# Altium PCB PM-1_InterfaceControler.PcbDoc
Units mm, origin at the board's own origin, x right, y up, seen from the top; angles counter-clockwise.
Board outline 31.4 x 21.4 mm, 2 copper layers (Top Layer, Bottom Layer); 30 components, 18 nets, 128 pads, 36 vias.
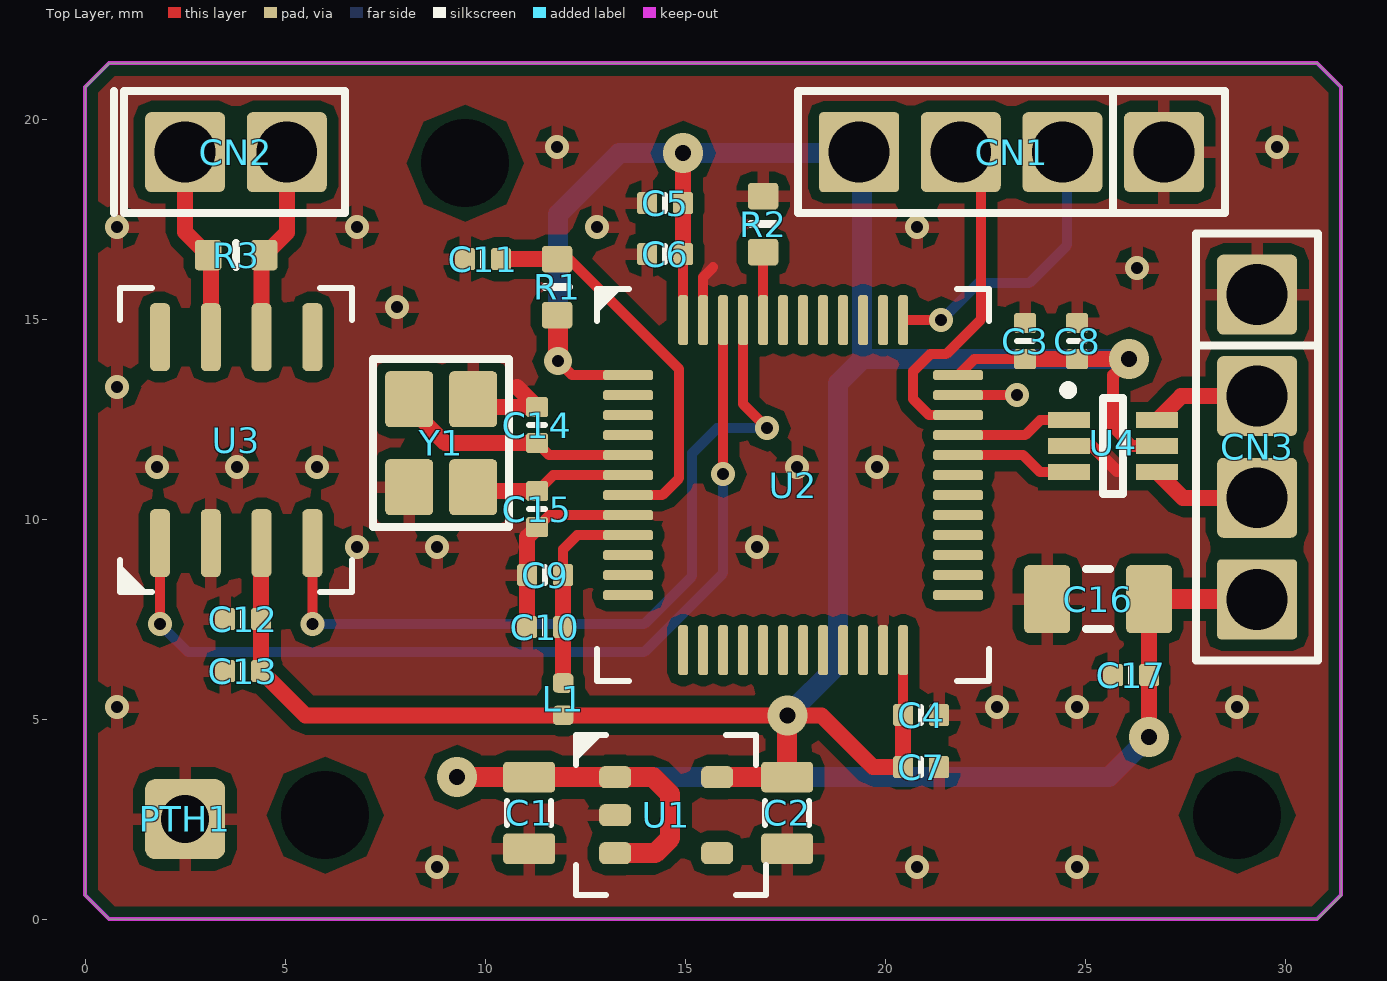
[diagram p0: Top Layer view]
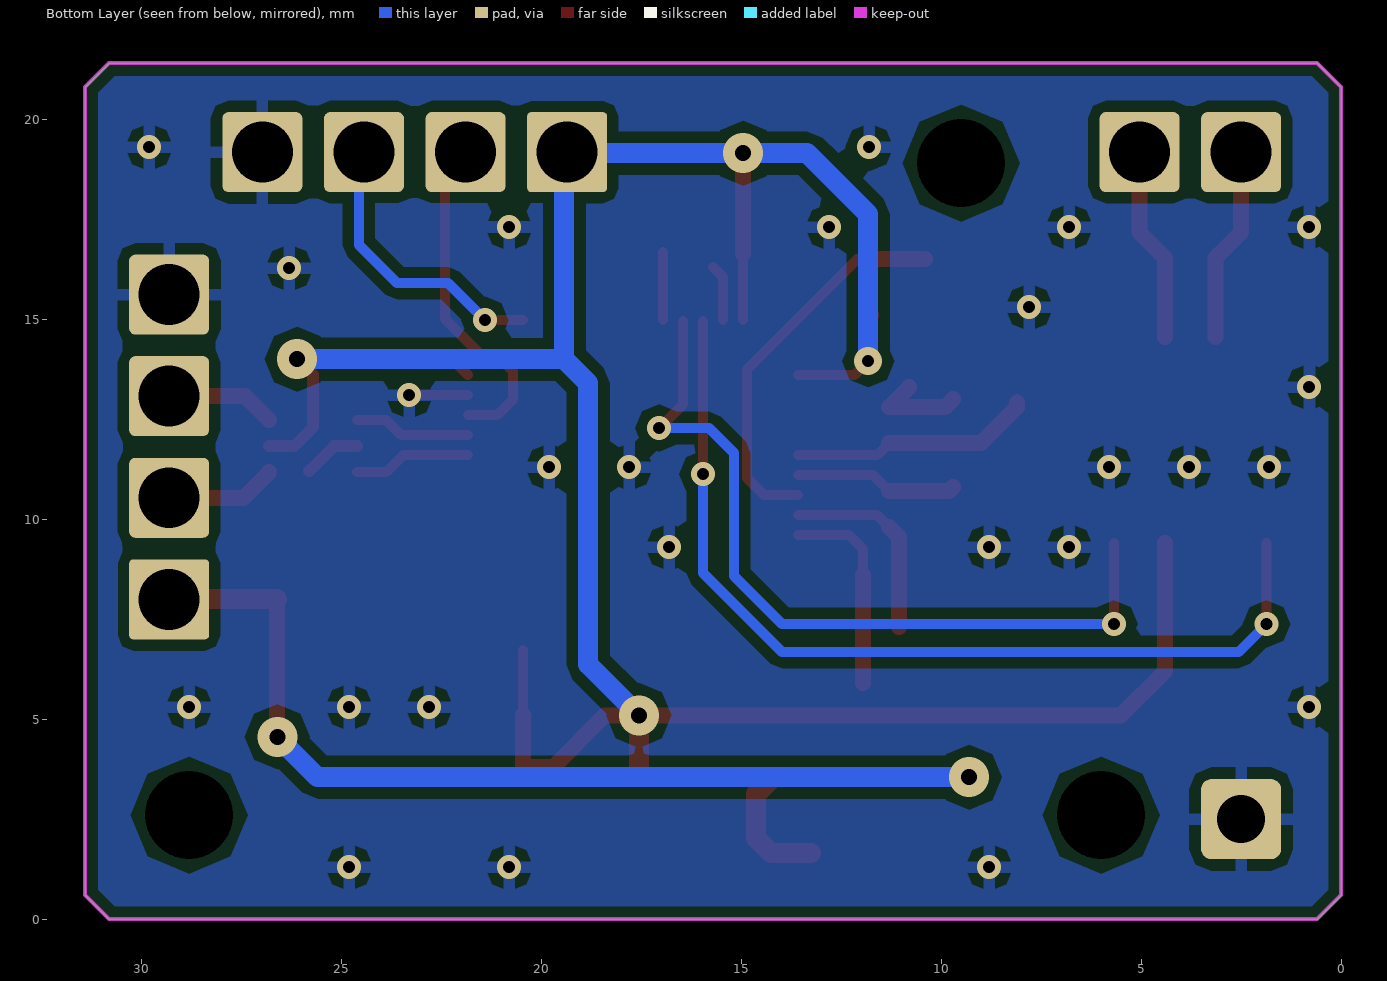
[diagram p1: Bottom Layer view, seen from below]
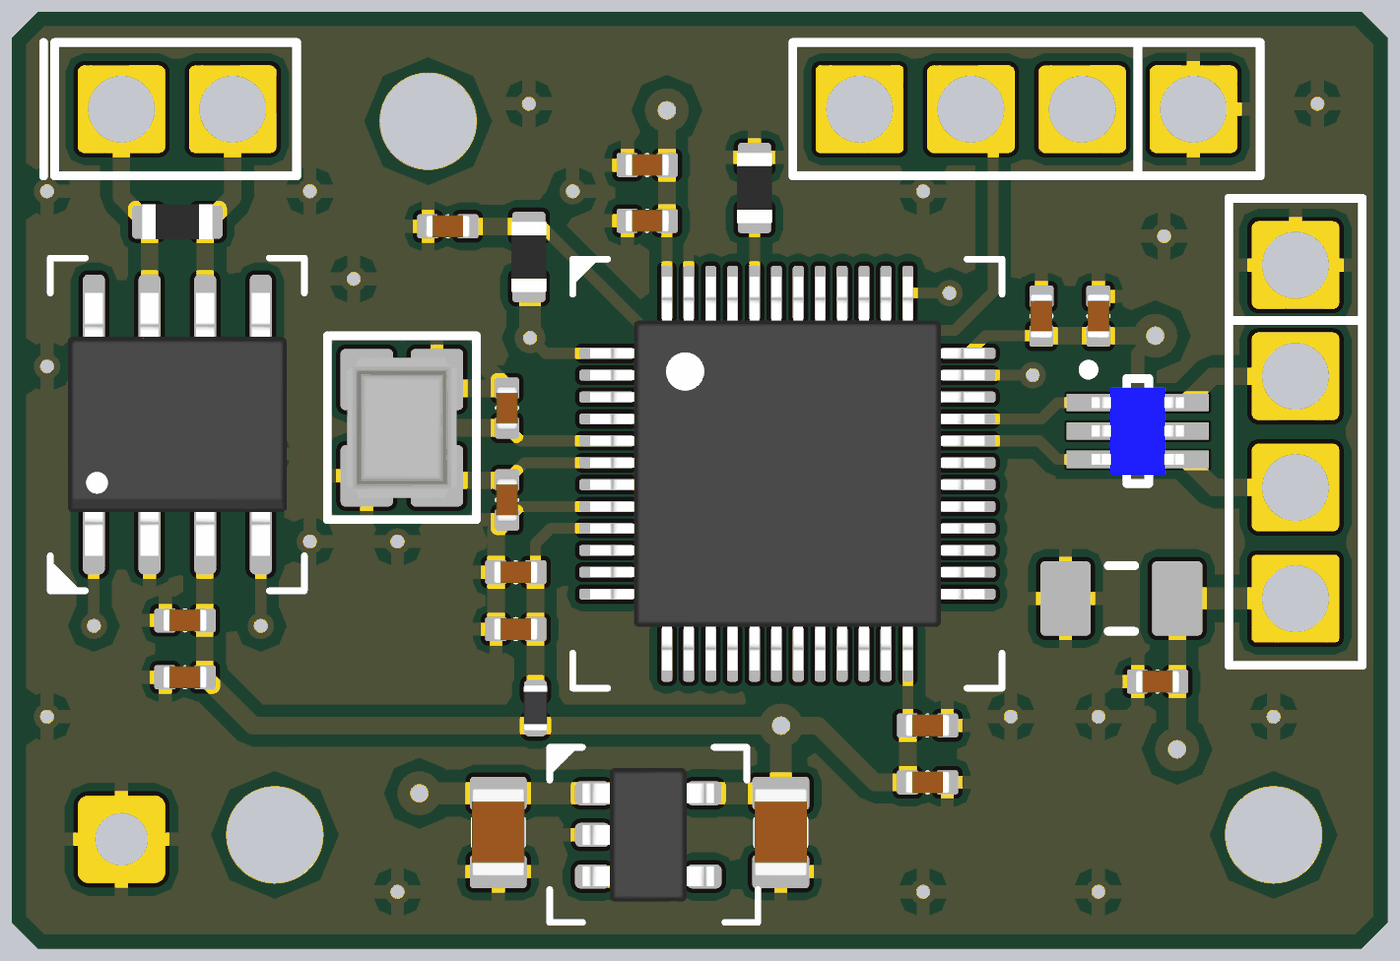
[diagram p2: 3D render of the assembled board from above, using the file's embedded part models]

## Layer stack, top to bottom
Top Solder: solder mask 0.0102, Solder Resist, Dk 3.5
Top Layer: signal copper 0.0356
Dielectric 1: dielectric 0.32, FR-4, Dk 4.8
Bottom Layer: signal copper 0.0356
Bottom Solder: solder mask 0.0102, Solder Resist, Dk 3.5

## Board outline
0,0.6 0,20.8 0.6,21.4 30.8,21.4 31.4,20.8 31.4,0.6 30.8,0 0.6,0

## Design rules (kind name [scope] priority, off if disabled: settings)
Clearance Clearance_Pol [InPolygon and InNet('GND')] p1: gap=0.25 ignorepadtopadclearanceinfootprint=FALSE
Clearance [All] p2: gap=0.2 ignorepadtopadclearanceinfootprint=FALSE
HoleSize PadSize [IsPad] p1: absolutevalues=TRUE maxlimit=5 minlimit=0.3 maxpercent=80.000 minpercent=20.000
HoleSize HoleSize_1 [All] p2: absolutevalues=TRUE maxlimit=5 minlimit=0.3 maxpercent=80.000 minpercent=20.000
HoleToHoleClearance [All] p1: gap=0.25 allowstackedmicrovias=TRUE
MatchedLengths SWD [(InNet('SWCLK') AND InNet('SWDIO'))] p1: tolerance=0.2 checknetsindiffpair=FALSE checkdiffpairvsdiffpair=TRUE checkxsignals=TRUE checkothers=TRUE
MatchedLengths CAN_Transiver [(InNet('CAN_RX') AND InNet('CAN_TX'))] p2: tolerance=0.5 checknetsindiffpair=FALSE checkdiffpairvsdiffpair=TRUE checkxsignals=TRUE checkothers=TRUE
MinimumSolderMaskSliver [All] p1: minsoldermaskwidth=0.15
PlaneConnect [All] p1: planeconnectstyle=Relief reliefexpansion=0.4 reliefentries=4 reliefconductorwidth=0.3 reliefairgap=0.25
PolygonConnect [All] p1: connectstyle=Relief reliefconductorwidth=0.3 reliefentries=4 polygonreliefangle="90 Angle" airgapwidth=0.254
RoomDefinition 1_MCU [InComponentClass('1_MCU')] p1: confinementstyle=ConfineIn formatcopy=TRUE lockcomponents=FALSE outline 6.846,9.446 6.846,14.354 8.771,14.354 8.771,17.229 10.921,17.229 10.921,17.279 13.321,17.279 13.321,18.629 16.071,18.629 16.071,18.854 17.472,18.854 17.472,21.053 28.848,21.053 28.848,17.297 25.529,17.297 25.529,12.871 22.929,12.871 22.929,5.621 22.079,5.621 22.079,3.071 19.721,3.071 19.721,4.471 11.271,4.471 11.271,6.571 10.321,6.571 10.321,9.446
RoomDefinition 2_Power [InComponentClass('2_Power')] p2: confinementstyle=ConfineIn formatcopy=TRUE lockcomponents=FALSE outline 1.146,1.146 1.146,3.854 9.971,3.854 9.971,4.439 11.946,4.439 11.946,4.929 17.354,4.929 17.354,4.439 18.679,4.439 18.679,0.881 17.354,0.881 17.354,0.271 11.946,0.271 11.946,0.881 9.971,0.881 9.971,1.146
RoomDefinition 3_CAN [InComponentClass('3_CAN')] p3: confinementstyle=ConfineIn formatcopy=TRUE lockcomponents=FALSE outline 0.368,17.297 0.368,21.053 6.854,21.053 6.854,16.104 7.004,16.104 7.004,7.846 5.129,7.846 5.129,5.471 2.771,5.471 2.771,7.846 0.546,7.846 0.546,17.297
RoomDefinition 4_USB [InComponentClass('4_USB')] p4: confinementstyle=ConfineIn formatcopy=TRUE lockcomponents=FALSE outline 23.096,6.721 23.096,9.279 23.596,9.279 23.596,13.804 27.422,13.804 27.422,17.493 31.178,17.493 31.178,6.117 27.329,6.117 27.329,5.371 24.971,5.371 24.971,6.721
RoutingVias [All] p1: holewidth=0.3 width=0.7 viastyle="Through Hole" minholewidth=0.3 minwidth=0.6 maxholewidth=2 maxwidth=3
SilkToSilkClearance [All] p1: silktosilkclearance=0.3
SilkToSolderMaskClearance [IsPad] p1: minsilkscreentomaskgap=0.2 clearancetoexposedcopper=TRUE
SolderMaskExpansion [All] p1: expansion=0.1
UnRoutedNet [All] p1: checkbadconnections=TRUE
Width [All] p1: maxlimit=10 minlimit=0.25 preferedwidth=0.25
23 further rules are at their usual default settings.

## Classes and differential pairs
component class 4_USB: C16 C17 CN3 U4
component class 3_CAN: C12 C13 CN2 R3 U3
component class 2_Power: C1 C2 PTH1 U1
component class 1_MCU: C3 C4 C5 C6 C7 C8 C9 C10 C11 C14 C15 CN1 L1 R1 R2 U2 Y1

## Components (designator, comment, footprint, x,y, rotation, side; value= is the part's Value field where it differs from the comment)
C1 "SC1U16V4KX" CAPC0805(2012)145_L 11.1,2.66 r90 top
C2 "SC1U16V4KX" CAPC0805(2012)145_L 17.55,2.66 r90 top
C3 "SC1U10V2KX" CAPC0402(1005)60_L 23.5,14.45 r270 top
C4 "SC1U10V2KX" CAPC0402(1005)60_L 20.9,5.1 r180 top
C5 "SC1U10V2KX" CAPC0402(1005)60_L 14.5,17.9 r0 top
C6 "SC100N50V2KX" CAPC0402(1005)60_L 14.5,16.625 r0 top
C7 "SC100N50V2KX" CAPC0402(1005)60_L 20.9,3.8 r180 top
C8 "SC100N50V2KX" CAPC0402(1005)60_L 24.8,14.45 r270 top
C9 "SC1U10V2KX" CAPC0402(1005)60_L 11.5,8.6 r0 top
C10 "SC100N50V2KX" CAPC0402(1005)60_L 11.5,7.3 r0 top
C11 "SC100N50V2KX" CAPC0402(1005)60_L 9.95,16.5 r0 top
C12 "SC1U10V2KX" CAPC0402(1005)60_L 3.95,7.5 r0 top
C13 "SC100N50V2KX" CAPC0402(1005)60_L 3.95,6.2 r0 top
C14 "SC12P50V2JN" CAPC0402(1005)33_L 11.3,12.35 r270 top
C15 "SC12P50V2JN" CAPC0402(1005)33_L 11.3,10.25 r90 top
C16 "SC47U10V6KX" CAPC1206(3216) 25.325,8 r0 top
C17 "SC100N50V2KX" CAPC0402(1005)60_L 26.15,6.1 r0 top
CN1 "SWD" 4PHEADERS-2D54 26.97,19.175 r180 top
CN2 "CAN" 2PHEADERS-2D54 2.5,19.175 r0 top
CN3 "USB" 4PHEADERS-2D54 29.3,15.615 r270 top
L1 "BLM15AG601SN1D" INDC1005X06L 11.95,5.5 r90 top
PTH1 "GND" POWERHOLE-LP 2.5,2.5 r0 top
R1 "10KR3J" RESC0603(1608)_L 11.8,15.8 r270 top
R2 "10KR3J" RESC0603(1608)_L 16.95,17.375 r270 top
R3 "120R3F" RESC0603(1608)_L 3.775,16.6 r180 top
U1 "LP5907MFX" SOT95P280X145-5L 14.525,2.6 r0 top
U2 "STM32F103C6T7A" TSQFP50P900X900X160-48L 17.7,10.85 r0 top
U3 "SN65HVD232" SOIC127P600X175-8L 3.775,11.975 r90 top
U4 "USBUF01W6" SOT323-6L 25.7,11.9 r270 top
Y1 "FA-12824.0000MF10Z-W3" QRTZ-12mhz 8.9,11.9 r90 top

## Footprints (in the part's own frame and the unit in brackets; to place one, negate y for a bottom-side part, rotate by r counter-clockwise, add the part's x,y. Pads: shape width x height; smd on the part's side, far side on the other; paste and mask are expansions set on the pad)
2PHEADERS-2D54 [mm]
  rrect15% 2x2 hole 1.524: 1(0,0) 2(2.54,0)
  silkscreen extent -1.78,-1.52 4,1.52
4PHEADERS-2D54 [mm]
  rrect15% 2x2 hole 1.524: 1(0,0) 2(2.54,0) 3(5.08,0)
  rrect10% 2x2 hole 1.524: 4(7.62,0)
  silkscreen extent -1.52,-1.52 9.14,1.52
CAPC0402(1005)33_L [mm]
  rrect25% 0.5x0.55 smd: 1(-0.45,0) 2(0.45,0)
  silkscreen extent 0,-0.2 0,0.2, body extent -0.5,-0.25 0.5,0.25, height 0.55
CAPC0402(1005)60_L [mm]
  rrect25% 0.5x0.55 smd: 1(-0.45,0) 2(0.45,0)
  silkscreen extent 0,-0.2 0,0.2, body extent -0.5,-0.25 0.5,0.25, height 0.6
CAPC0805(2012)145_L [mm]
  rrect25% 0.76x1.3 smd: 1(-0.9,0) 2(0.89,0)
  silkscreen extent -0.3,-0.55 0.3,0.55, body extent -1,-0.6 1,0.6, height 1.45
CAPC1206(3216) [mm] "Chip Capacitor, 2-Leads, Body 3,20x1,60mm, IPC High Density"
  rrect20% 1.15x1.7 smd: 1(-1.275,0) 2(1.275,0)
  silkscreen extent -0.3,-0.75 0.3,0.75, body extent -1.7,-0.9 1.7,0.9, height 1.6
INDC1005X06L [mm] "Chip Inductor, 2-Leads, Body 1,00x0,50mm, IPC High Density"
  rrect50% 0.49x0.52 smd: 1(-0.405,0) 2(0.405,0)
  body extent -0.53,-0.28 0.53,0.28, height 0.55
POWERHOLE-LP [mm]
  rrect25% 2x2 hole 1.2: 1(0,0)
QRTZ-12mhz [mm]
  rrect20% 1.4x1.2 smd: 1(-1.1,-0.8) 2(1.1,-0.8) 3(1.1,0.8) 4(-1.1,0.8)
  silkscreen extent -2.1,-1.7 2.1,1.7, body extent -1.6,-1.25 1.6,1.25, height 0.8
RESC0603(1608)_L [mm]
  rrect25% 0.66x0.76 smd: 1(-0.7,0) 2(0.7,0)
  silkscreen extent 0,-0.3 0,0.3, body extent -0.8,-0.4 0.8,0.4, height 0.45
SOIC127P600X175-8L [mm] "SOIC, 8-Leads, Body 4,90x3,90mm, Pitch 1,27mm, IPC High Density"
  rrect50% 1.7x0.5 smd: 1(-2.575,1.905) 2(-2.575,0.635) 3(-2.575,-0.635) 4(-2.575,-1.905) 5(2.575,-1.905) 6(2.575,-0.635) 7(2.575,0.635) 8(2.575,1.905)
  silkscreen extent -3.8,-2.9 3.8,2.9, body extent -3,-2.5 3,2.5, height 1.75
SOT95P280X145-5L [mm] "SOT23, 5-Leads, Body 2,90x2,80mm, Pitch 0,95mm, IPC High Density"
  rrect50% 0.8x0.55 smd: 1(-1.275,0.95) 2(-1.275,0) 3(-1.275,-0.95) 4(1.275,-0.95) 5(1.275,0.95)
  silkscreen extent -2.25,-2 2.5,2, body extent -1.5,-1.53 1.5,1.53, height 1.45
SOT323-6L [mm]
  rect 0.4x1.05 smd mask+0.05: 1(-0.575,-1.1) 2(0.075,-1.1) 3(0.725,-1.1) 4(0.725,1.1) 5(0.075,1.1) 6(-0.575,1.1)
  round 0.5 on Mech2: 7(-0.725,-0.9)
  silkscreen extent -1.42,-1.22 1.28,0.25, body extent -0.92,-1.05 1.08,1.05, height 0.91
TSQFP50P900X900X160-48L [mm] "TSQFP, 48-Leads, Body 7,00x7,00mm, Pitch 0,50mm, IPC High Density"
  rrect50% 1.25x0.25 smd: 1(-4.125,2.75) 2(-4.125,2.25) 3(-4.125,1.75) 4(-4.125,1.25) 5(-4.125,0.75) 6(-4.125,0.25) 7(-4.125,-0.25) 8(-4.125,-0.75) 9(-4.125,-1.25) 10(-4.125,-1.75) 11(-4.125,-2.25) 12(-4.125,-2.75) 25(4.125,-2.75) 26(4.125,-2.25) 27(4.125,-1.75) 28(4.125,-1.25) 29(4.125,-0.75) 30(4.125,-0.25) 31(4.125,0.25) 32(4.125,0.75) 33(4.125,1.25) 34(4.125,1.75) 35(4.125,2.25) 36(4.125,2.75)
  rrect50% 0.25x1.25 smd: 13(-2.75,-4.125) 14(-2.25,-4.125) 15(-1.75,-4.125) 16(-1.25,-4.125) 17(-0.75,-4.125) 18(-0.25,-4.125) 19(0.25,-4.125) 20(0.75,-4.125) 21(1.25,-4.125) 22(1.75,-4.125) 23(2.25,-4.125) 24(2.75,-4.125) 37(2.75,4.125) 38(2.25,4.125) 39(1.75,4.125) 40(1.25,4.125) 41(0.75,4.125) 42(0.25,4.125) 43(-0.25,4.125) 44(-0.75,4.125) 45(-1.25,4.125) 46(-1.75,4.125) 47(-2.25,4.125) 48(-2.75,4.125)
  silkscreen extent -4.9,-4.9 4.9,4.9, body extent -4.5,-4.5 4.5,4.5, height 1.6

## Part data
C1 C2: library part CAP(0805)1UF16V, "CAP 1uF 16V ±10% 0805(1610 Metric) Thickness 0.6mm SMD"
C3 C4 C5 C9 C12: library part CAP(0402)1UF10V, "CAP 1uF 10V ±10% 0402 (1005 Metric) Thickness 0.6mm SMD"
C6 C7 C8 C10 C11 C13 C17: library part CAP(0402)100nF50V, "CAP 100nF 50V ±10% 0402 (1005 Metric) Thickness 0.6mm SMD"
C14 C15: library part CAP12pF, "CAP 12pF 50V ±5% 0402 (1005 Metric) Thickness 0.33mm SMD"
C16: library part CAP(1206)47UF10V, "CAP 47uF 10V ±10% 1206(3216 Metric) Thickness 1.8mm SMD"
CN1 CN3: library part 4PIN-CN, "4 holes for 18awg wire", Manufacturer=JST, Package Reference=JST-BM04B-GHS-TBT, Datasheet URL=http://www.jst-mfg.com/product/pdf/eng/eGH.pdf
CN2: library part 2PIN-CN, "2 holes for 18awg wire", Manufacturer=JST, Package Reference=JST-BM04B-GHS-TBT, Datasheet URL=http://www.jst-mfg.com/product/pdf/eng/eGH.pdf
L1: library part IND-filt, "Chip Ferrite Bead Single Type 600 Ohms 300mA"
PTH1: library part PTH-1D2M, "1.2mm hole 2mm pad", Hole diameter (mm)=2.5, Pad diameter (mm)=5
R1 R2: library part RES0(0603)_10K, "10K 0.1W 5% 0603 (1608 Metric)  SMD"
R3: library part RES0(0603)_120R, "120R 0.1W 1% 0603 (1608 Metric)  SMD"
U1: library part LP5907V3.3, "3.3V 250mA"
U2: "ARM® Cortex®-M3 STM32F1 Microcontroller IC 32-Bit 72MHz 32KB 48-LFQP (7x7)", Case/Package=UFQFN-48, Operating Frequency(F) (Processor speed) (MHz)=80, Package Description="48-Pin Ultra Thin Fine Pitch Quad Flat No-Lead, 7 x 7 x 0.6 mm Body, 0.5 mm Pitch, Exposed Pad", Package Reference=UFQFPN48, Supply Voltage(Vcc) min (V)=2, ComponentLink1Description="Manufacturer URL", ComponentLink1URL=http://www.st.com/, ComponentLink2Description=Datasheet, ComponentLink2URL=http://www.st.com/st-web-ui/static/active/en/resource/technical/document/datasheet/CD00161566.pdf, Core="ARM Cortex-M4", FLASH Size (Prog) (kB)=512, I/Os=38, Internal RAM Size (kB)=160, Mounting Technology="Surface Mount", Packing="Tape and Reel", RoHS Compliant=Yes
U3: library part CAN_SN65HVD232D, "IC CAN TRANSCEIVER 8-SOIC"
Y1: library part XTAL-1-3-4, "Crystal, 24 MHz, +/- 10 ppm, -20 to 75 degC, 4-Pin SMD, RoHS, Tape and Reel", Case/Package=SMD/SMT, ESR (Equivalent Series Resistance)=80R, Frequency=24MHz, Frequency Stability=10ppm, Load Capacitance=12pF, Max Operating Temperature=75°C, Min Operating Temperature=-20°C, Package Quantity=250, Frequency Tolerance=10ppm, Height=0.02inch, Lead Free="Lead Free", Length=0.079inch, Mount="Surface Mount", Mounting Technology=SMT, Number of Pins=4, Packaging="Tape and Reel", Radiation Hardening=No, RoHS Compliant=Yes, Termination=SMD/SMT, Tolerance=10ppm, Width=0.063inch

## Free pads (board coordinates)
  round 0 hole 2.2: ""(6,2.6) ""(9.5,18.9) ""(28.8,2.6)

## Via types
v1: diameter 0.6, hole 0.3, Top Layer to Bottom Layer, tented both sides, 30 vias
v2: diameter 1, hole 0.4, Top Layer to Bottom Layer, tented both sides, 5 vias
v3: diameter 0.7, hole 0.3, Top Layer to Bottom Layer, tented both sides, 1 vias

## Nets (pads, with @x,y where several pads share a name; then routed paths per layer and width w, separated by ;. In a path a pad name is that pad's centre, name@x,y a point inside that pad or via, vN(x,y) a via of type N, cw(c..) or ccw(c..) an arc to the next point about the centre after c; other vN are vias at no path point)
BOOT: R2.2 U2.44 | length 1.7
  Top Layer w0.25: U2.44 R2.2
CAN_RX: U2.45 U3.4 | length 20.1
  Top Layer w0.25: v1(5.68,7.375) U3.4 ; U2.45@16.45,14.95 16.45,12.875 v1(17.05,12.275)
  Bottom Layer w0.25: v1(5.68,7.375) 13.975,7.375 15.175,8.575 15.175,11.65 15.8,12.275 v1(17.05,12.275)
CAN_TX: U2.46 U3.1 | length 23.5
  Top Layer w0.25: v1(1.87,7.375) U3.1 ; v1(15.95,11.125) U2.46@15.95,14.95
  Bottom Layer w0.25: v1(1.87,7.375) 2.57,6.675 13.975,6.675 15.95,8.65 v1(15.95,11.125)
GND: C1.1 C2.1 C3.1 C4.1 C5.1 C6.1 C7.1 C8.1 C9.1 C10.1 C11.1 C12.1 C13.1 C14.1 C15.1 C16.1 C17.1 CN1.1 CN3.1 PTH1.1 R2.1 U1.2 U2.8 U2.23 U2.35 U2.47 U3.2 U4.2 Y1.2 Y1.4 | length 11.8
  Top Layer w0.25: C15.1 11.6,10.1 U2.8 ; U2.47 15.45,16.05 15.7,16.3 ; U2.35 v1(23.3,13.1)
  Top Layer w0.3: U4.2 25.175,11.825 25.8,11.2
  Top Layer w0.4: Y1.2 9.9,12.8 C14.1 10.8,13.3 ; C10.1 C9.1 11.05,9.55 C15.1
  other v1: 8.8,1.3 20.8,1.3 24.8,1.3 0.8,5.3 22.8,5.3 24.8,5.3 28.8,5.3 6.8,9.3 8.8,9.3 16.8,9.3 1.8,11.3 3.8,11.3 5.8,11.3 17.8,11.3 19.8,11.3 0.8,13.3 7.8,15.3 26.3,16.275 0.8,17.3 6.8,17.3 12.8,17.3 20.8,17.3 11.8,19.3 29.8,19.3
MCU_RST: C11.2 R1.1 U2.7 | length 9.8
  Top Layer w0.25: R1.1 12.1,16.5 14.85,13.75 14.85,11.025 14.425,10.6 U2.7
  Top Layer w0.4: C11.2 R1.1
NetCN2_1: CN2.1 R3.2 U3.7 | length 4.9
  Top Layer w0.4: CN2.1 2.5,17.175 R3.2 3.14,16.535 U3.7
NetCN2_2: CN2.2 R3.1 U3.6 | length 4.9
  Top Layer w0.4: U3.6 4.41,16.535 R3.1 5.04,17.165 CN2.2
NetCN3_2: CN3.2 U4.6 | length 2.7
  Top Layer w0.4: U4.6 27.4,13.075 CN3.2
NetCN3_3: CN3.3 U4.4 | length 2.8
  Top Layer w0.4: U4.4 27.44,10.535 CN3.3
OSC_IN: C14.2 U2.5 Y1.3 | length 6.2
  Top Layer w0.25: Y1.3@8.1,12.911 Y1.3 ; C14.2 11.6,11.6 U2.5
  Top Layer w0.4: Y1.3@8.1,12.911 8.1,12.805 9.005,11.9 C14.2
OSC_OUT: C15.2 U2.6 Y1.1 | length 4.1
  Top Layer w0.25: C15.2 11.7,11.1 U2.6
  Top Layer w0.4: Y1.1 9.8,10.7 C15.2
SWCLK: CN1.2 U2.37 | length 7.3
  Top Layer w0.25: U2.37 v1(21.4,14.975)
  Bottom Layer w0.25: v1(21.4,14.975) 22.325,15.9 23.6,15.9 24.55,16.85 24.55,19.005 CN1.2@24.38,19.175
SWDIO: CN1.3 U2.34 | length 8.8
  Top Layer w0.25: U2.34 21.1,12.6 20.7,13 20.7,13.7 21.125,14.125 21.525,14.125 22.4,15 22.4,18.95 22.175,19.175 CN1.3
USB_DM: U2.32 U4.3 | length 3
  Top Layer w0.25: U2.32 23.45,11.6 23.875,11.175 U4.3
USB_DP: U2.33 U4.1 | length 2.9
  Top Layer w0.25: U2.33 23.5,12.1 23.875,12.475 U4.1
VCC3: C2.2 C3.2 C4.2 C5.2 C6.2 C7.2 C8.2 C12.2 C13.2 CN1.4 L1.1 R1.2 U1.5 U2.1 U2.24 U2.36 U2.48 U3.3 U4.5 | length 74.7
  Top Layer w0.25: v3(11.825,13.95) 12.175,13.6 U2.1 ; U2.48 C6.2 ; C4.2 U2.24 ; U2.36 22.225,14 C3.2
  Top Layer w0.3: v2(26.1,14) 25.7,13.6 25.7,12.3 26.175,11.825 U4.5
  Top Layer w0.4: U3.3 4.4,9.39 C12.2 C13.2 5.505,5.095 L1.1 v2(17.555,5.095) 18.405,5.095 19.7,3.8 C7.2 C4.2 C4.2@20.445,5.095 ; C6.2 C5.2 v2(14.95,19.15) ; C3.2 C8.2 v2(26.1,14)
  Top Layer w0.5: R1.2 11.825,15.075 v3(11.825,13.95) ; U1.5 C2.2 17.55,5.09 v2(17.555,5.095)
  Bottom Layer w0.5: v3(11.825,13.95) 11.825,17.625 13.35,19.15 v2(14.95,19.15) 19.325,19.15 CN1.4 19.425,19.1 19.425,14 ; v2(17.555,5.095) 18.825,6.365 18.825,13.4 19.425,14 ; v2(26.1,14) 19.425,14
VCC5: C1.2 C16.2 C17.2 CN3.4 U1.1 U1.3 | length 31.6
  Top Layer w0.4: v2@26.6,4.56 C17.2 C16.2
  Top Layer w0.5: v2(9.3,3.55) C1.2 ; C1.2@11.5,3.55 U1.1 14.2,3.55 14.625,3.125 14.625,2.025 14.25,1.65 U1.3 ; C16.2 29.295,8 CN3.4
  Bottom Layer w0.5: v2(9.3,3.55) 25.59,3.55 v2(26.595,4.555)
VDDA: C9.2 C10.2 L1.2 U2.9 | length 5.1
  Top Layer w0.25: C9.2 11.95,9.25 12.3,9.6 U2.9
  Top Layer w0.4: L1.2 C10.2 C9.2
pads on no net: U1.4 U2.2 U2.3 U2.4 U2.10 U2.11 U2.12 U2.13 U2.14 U2.15 U2.16 U2.17 U2.18 U2.19 U2.20 U2.21 U2.22 U2.25 U2.26 U2.27 U2.28 U2.29 U2.30 U2.31 U2.38 U2.39 U2.40 U2.41 U2.42 U2.43 U3.5 U3.8 U4.7

## Polygon pours and split planes (outlines as drawn)
GND on Top Layer "Top Layer-GND" (solid, pour order 2): 0,0.6 0,20.8 0.6,21.4 30.8,21.4 31.4,20.8 31.4,0.6 30.8,0 0.6,0
GND on Bottom Layer "Bottom Layer-GND" (solid, pour order 3): 0,0.6 0,20.8 0.6,21.4 30.8,21.4 31.4,20.8 31.4,0.6 30.8,0 0.6,0

## Keep-outs
Keep-Out Layer:
  the board outline again, w0.1